# Altium PCB Template2.PcbDoc (part 2 of 2)
Units mm, origin at the board's own origin, x right, y up, seen from the top; angles counter-clockwise.
Board outline 69.9 x 99.85 mm, 4 copper layers (Top Layer, InternalGND, Internal3V3, Bottom Layer), stack 1.563 mm thick; 143 components, 104 nets, 478 pads, 688 vias.
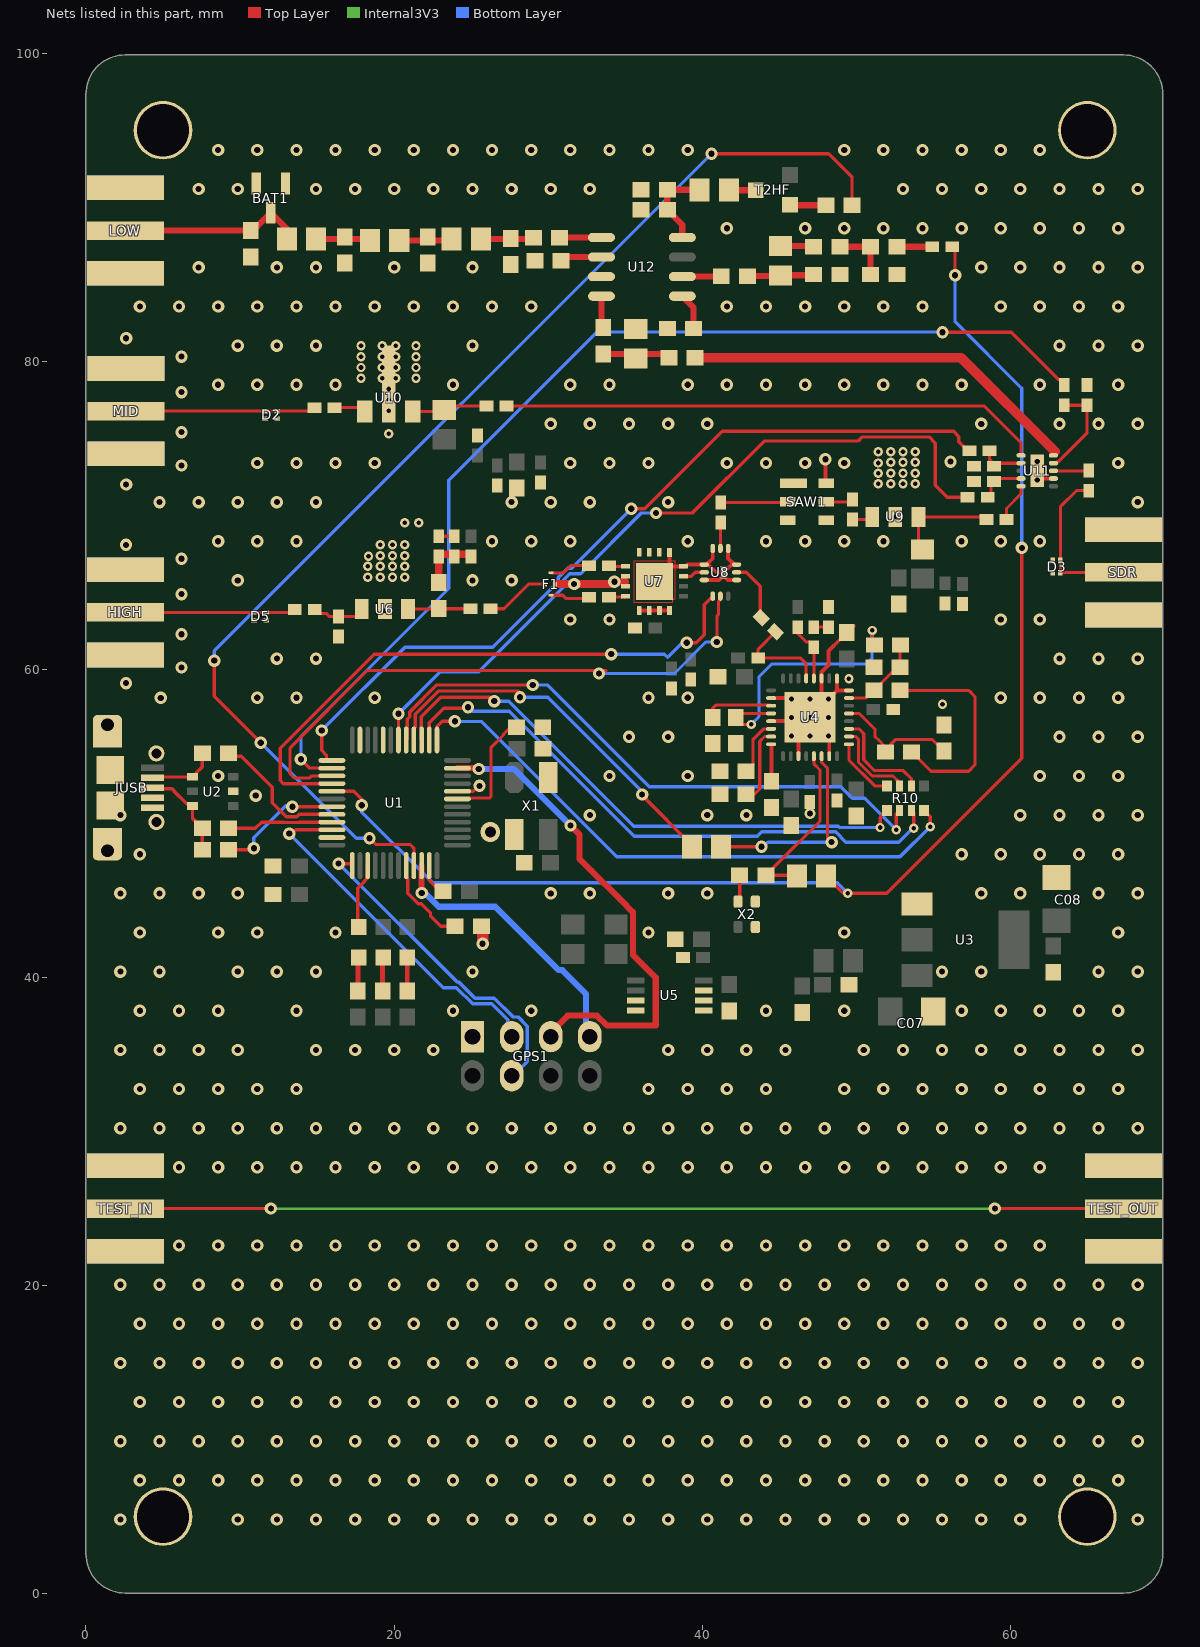
[diagram p4: the nets of this part, all layers, seen from the top]

## Via types
v1: diameter 0.8, hole 0.4, Top Layer to Bottom Layer, 595 vias
v2: diameter 0.61, hole 0.3, Top Layer to Bottom Layer, 55 vias
v3: diameter 0.6, hole 0.3, Top Layer to Bottom Layer, 16 vias
v4: diameter 0.66, hole 0.33, Top Layer to Bottom Layer, tented top, 11 vias
v5: diameter 1.27, hole 0.711, Top Layer to Bottom Layer, 10 vias
v6: diameter 0.7, hole 0.4, Top Layer to Bottom Layer, 1 vias

## Nets (pads, with @x,y where several pads share a name; then routed paths per layer and width w, separated by ;. In a path a pad name is that pad's centre, name@x,y a point inside that pad or via, vN(x,y) a via of type N, cw(c..) or ccw(c..) an arc to the next point about the centre after c; other vN are vias at no path point) (continued)
CPU_USB_LED: U1.39 USB.2 | length 3.9
  Top Layer w0.22: USB.2@17.654,43.576 17.654,45.804 18.066,46.216 18.066,46.237 18.271,46.442 18.271,47.249 U1.39@18.286,47.264
CS_PLL: R10.5 U1.14 | length 38.5
  Top Layer w0.22: U1.14@22.286,55.414 22.286,56.539 23.236,57.489 24.65,57.489 v1@24.8,57.639 ; R10.5@53.6,50.839 53.736,50.703 v3(53.736,49.689)
  Bottom Layer w0.22: v1(24.8,57.539) 25.06,57.279 27.48,57.279 35.6,49.159 43.587,49.159 43.877,49.449 48.673,49.449 49.333,48.789 52.764,48.789 53.664,49.689 v3(53.736,49.689)
CS_U1: R10.6 U4.3 | length 6.9
  Top Layer w0.2: U4.3@49.525,56.139 50.178,56.139 50.486,55.831 50.486,54.136 51.191,53.431 53.058,53.431 53.6,52.889 R10.6@53.6,52.439
DOWNCONV_IN: C44.2 U11.5 | length 2.5
  Top Layer w0.2: C44.2@59.75,69.739 59.75,70.45 60.7,71.4 U11.5@60.7,71.889
GND: BAT1.1 BAT1.2 C01.1 C02.1 C03.1 C04.1 C05.1 C06.1 C07.2 C08.2 C09.1 C10.1 C11.1 C12.1 C13.1 C14.1 C15.1 C16.1 C17.1 C18.1 C19.1 C20.1 C21.1 C22.1 C23.1 C25.1 C28.1 C29.1 C32.1 C33.2 C34.1 C38.1 C39.1 C40.1 C41.1 C45.2 C46.2 C47.1 C48.2 C49.2 C50.1 C54.1 C55.1 C56.1 C57.1 C58.1 C59.1 C60.1 C62.2 C64.1 D2.1 D2.2 D3.1 D3.2 D5.1 D5.2 F1.4 GPS1.1 H1.0 H2.0 H3.0 H4.0 HIGH.2 HIGH.3 HIGH.4 HIGH.5 JUSB.4 JUSB.5 JUSB.6 L9.1 LOW.2 LOW.3 LOW.4 LOW.5 MID.2 MID.3 MID.4 MID.5 R01.1 R08.1 R14.1 R17.1 R24.1 R26.1 R27.2 R28.2 SAW1.1 SAW1.3 SAW1.4 SAW1.6 SDR.2 SDR.3 SDR.4 SDR.5 TEST_IN.2 TEST_IN.3 TEST_IN.4 TEST_IN.5 TEST_OUT.2 TEST_OUT.3 TEST_OUT.4 TEST_OUT.5 U1.8 U1.20 U1.23 U1.35 U1.47 U2.2 U3.1 U4.8 U4.9 U4.11 U4.18 U4.21 U4.27 U4.31 U4.33 U5.3 U5.4 U5.5 U5.6 U5.7 U6.2 U7.4 U7.5 U7.6 U7.7 U7.8 U7.10 U7.11 U7.13 U7.14 U7.15 U7.16 U7.17 U8.1 U8.3 U8.4 U8.6 U8.10 U8.12 U8.13 U9.2 U10.2 U11.7 U11.11 U12.3 X1.2 X1.4 X2.1 X2.2 | length 55.1
  Top Layer w0.22: U1.35@15.946,49.074 U1.35@15.961,49.089 ; U1.47@22.286,47.264 22.286,46.298 22.975,45.609 C02.1@23.183,45.609 ; U1.8@24.111,52.089 25.15,52.092 v1(25.55,52.439) ; C05.1@29.65,55.279 30.04,54.889 30.08,54.889 C05.1@29.861,55.108 ; C06.1@29.861,56.028 C06.1@29.65,56.239 29.69,56.239 C06.1@30.08,55.849 ; C19.1@46.986,51.381 46.986,50.673 ccw(c47.034,50.673) v6(47,50.639)
  Top Layer w0.25: C33.2@22.9,68.639 C34.1@23.909,68.639 ; v1@34.001,65.539 34.151,65.689 v1(34.3,65.689) ; U7.11@35.013,65.387 35.013,65.689 U7.10@35.013,66.039 ; U7.17@35.925,64.739 U7.17@36.9,65.714 ; U7.13@35.925,63.825 U7.13@35.925,63.825 U7.14@36.575,63.825 ; U7.14@36.575,63.825 U7.14@36.575,63.825 ; U7.16@37.875,63.826 37.227,63.827 37.225,63.826 U7.14@36.575,63.825 U7.14@36.575,63.825 ; U7.17@37.875,64.739 U7.17@36.9,65.714 ; U7.5@37.875,67.599 37.875,67.064 U7.17@37.875,66.689 ; U8.6@40.136,65.804 41.086,65.804 U8.13@41.386,66.104 ; U8.3@40.686,67.854 40.686,67.204 40.286,66.804 U8.4@40.136,66.804 ; U8.1@41.686,67.854 41.686,67.204 42.086,66.804 U8.12@42.236,66.804 42.226,66.794 41.901,66.794 41.686,66.579 41.461,66.579 41.386,66.504 U8.13@41.386,66.304 ; U8.10@42.236,65.804 41.686,65.804 U8.13@41.386,66.104 ; U4.21@44.475,56.639 U4.33@46.75,56.639 ; U4.18@44.475,58.139 45.75,58.139 v4(45.8,58.089) v4(47,56.889) ; U4.27@46.25,54.364 46.25,56.139 U4.33@46.75,56.639 ; v1(47.996,73.639) 47.996,72.128 SAW1.6@48.047,72.076 ; U4.31@48.25,54.364 48.25,55.639 v4(48.2,55.689) v4(47,56.889) ; U4.9@48.75,59.414 48.75,58.639 ; U4.8@49.525,58.639 48.75,58.639 ; C15.1@49.811,62.806 49.761,62.806 49.386,62.431 C15.1@49.386,62.381 49.386,62.331 49.011,61.956 48.961,61.956 48.2,61.195 48.2,60.289 47.75,59.839 U4.11@47.75,59.414 U4.33@47.75,57.639 ; U11.11@61.75,72.889 61.75,72.714 62.075,72.389 U11.7@62.8,72.389 ; U7.17@36.9,65.714 U7.17@37.875,66.689 ; U7.17@37.876,66.689 38.25,66.689 U7.4@38.787,66.689 38.925,66.689 39.039,66.804 U8.4@40.136,66.804 ; U8.4@40.136,66.804 40.146,66.794 40.421,66.794 40.911,66.304 U8.13@41.386,66.304 ; U8.13@41.386,66.104 U8.13@41.386,66.304 ; U4.33@46.75,56.639 v4(47,56.889) ; v4(47,56.889) U4.33@47.75,57.639 ; U4.33@47.75,57.639 48.75,58.639
  Top Layer w0.5: F1.4@30.511,65.539 v1@34.001,65.539 ; v1(34.3,65.689) 35.013,65.689
  Top Layer w0.75: v1(25.75,42.189) R01.1@25.75,43.289
  other v1: 2.23,4.819 9.85,4.819 12.39,4.819 14.93,4.819 17.47,4.819 20.01,4.819 22.55,4.819 25.09,4.819 27.63,4.819 30.17,4.819 32.71,4.819 35.25,4.819 37.79,4.819 40.33,4.819 42.87,4.819 45.41,4.819 47.95,4.819 50.49,4.819 53.03,4.819 55.57,4.819 58.11,4.819 60.65,4.819 68.27,4.819 3.5,7.359 6.04,7.359 8.58,7.359 11.12,7.359 13.66,7.359 16.2,7.359 18.74,7.359 21.28,7.359 23.82,7.359 26.36,7.359 28.9,7.359 31.44,7.359 33.98,7.359 36.52,7.359 39.06,7.359 41.6,7.359 44.14,7.359 46.68,7.359 49.22,7.359 51.76,7.359 54.3,7.359 56.84,7.359 59.38,7.359 61.92,7.359 64.46,7.359 67,7.359 2.23,9.899 4.77,9.899 7.31,9.899 9.85,9.899 12.39,9.899 14.93,9.899 17.47,9.899 20.01,9.899 22.55,9.899 25.09,9.899 27.63,9.899 30.17,9.899 32.71,9.899 35.25,9.899 37.79,9.899 40.33,9.899 42.87,9.899 45.41,9.899 47.95,9.899 50.49,9.899 53.03,9.899 55.57,9.899 58.11,9.899 60.65,9.899 63.19,9.899 65.73,9.899 68.27,9.899 3.5,12.439 6.04,12.439 8.58,12.439 11.12,12.439 13.66,12.439 16.2,12.439 18.74,12.439 21.28,12.439 23.82,12.439 26.36,12.439 28.9,12.439 31.44,12.439 33.98,12.439 36.52,12.439 39.06,12.439 41.6,12.439 44.14,12.439 46.68,12.439 49.22,12.439 51.76,12.439 54.3,12.439 56.84,12.439 59.38,12.439 61.92,12.439 64.46,12.439 67,12.439 2.23,14.979 4.77,14.979 7.31,14.979 9.85,14.979 12.39,14.979 14.93,14.979 17.47,14.979 20.01,14.979 22.55,14.979 25.09,14.979 27.63,14.979 30.17,14.979 32.71,14.979 35.25,14.979 37.79,14.979 40.33,14.979 42.87,14.979 45.41,14.979 47.95,14.979 50.49,14.979 53.03,14.979 55.57,14.979 58.11,14.979 60.65,14.979 63.19,14.979 65.73,14.979 68.27,14.979 3.5,17.519 6.04,17.519 8.58,17.519 11.12,17.519 13.66,17.519 16.2,17.519 18.74,17.519 21.28,17.519 23.82,17.519 26.36,17.519 28.9,17.519 31.44,17.519 33.98,17.519 36.52,17.519 39.06,17.519 41.6,17.519 44.14,17.519 46.68,17.519 49.22,17.519 51.76,17.519 54.3,17.519 56.84,17.519 59.38,17.519 61.92,17.519 64.46,17.519 67,17.519 2.23,20.059 4.77,20.059 7.31,20.059 9.85,20.059 12.39,20.059 14.93,20.059 17.47,20.059 20.01,20.059 22.55,20.059 25.09,20.059 27.63,20.059 30.17,20.059 32.71,20.059 35.25,20.059 37.79,20.059 40.33,20.059 42.87,20.059 45.41,20.059 47.95,20.059 50.49,20.059 53.03,20.059 55.57,20.059 58.11,20.059 60.65,20.059 63.19,20.059 65.73,20.059 68.27,20.059 6.04,22.599 8.58,22.599 11.12,22.599 13.66,22.599 16.2,22.599 18.74,22.599 21.28,22.599 23.82,22.599 26.36,22.599 28.9,22.599 31.44,22.599 33.98,22.599 36.52,22.599 39.06,22.599 41.6,22.599 44.14,22.599 46.68,22.599 49.22,22.599 51.76,22.599 54.3,22.599 56.84,22.599 59.38,22.599 61.92,22.599 6.04,27.679 8.58,27.679 11.12,27.679 13.66,27.679 16.2,27.679 18.74,27.679 21.28,27.679 23.82,27.679 26.36,27.679 28.9,27.679 31.44,27.679 33.98,27.679 36.52,27.679 39.06,27.679 41.6,27.679 44.14,27.679 46.68,27.679 49.22,27.679 51.76,27.679 54.3,27.679 56.84,27.679 59.38,27.679 61.92,27.679 2.23,30.219 4.77,30.219 7.31,30.219 9.85,30.219 12.39,30.219 14.93,30.219 17.47,30.219 20.01,30.219 22.55,30.219 25.09,30.219 27.63,30.219 30.17,30.219 32.71,30.219 35.25,30.219 37.79,30.219 40.33,30.219 42.87,30.219 45.41,30.219 47.95,30.219 50.49,30.219 53.03,30.219 55.57,30.219 58.11,30.219 60.65,30.219 63.19,30.219 65.73,30.219 68.27,30.219 3.5,32.759 6.04,32.759 8.58,32.759 11.12,32.759 13.66,32.759 36.52,32.759 39.06,32.759 41.6,32.759 44.14,32.759 49.22,32.759 51.76,32.759 54.3,32.759 56.84,32.759 59.38,32.759 61.92,32.759 64.46,32.759 67,32.759 2.23,35.299 4.77,35.299 7.31,35.299 9.85,35.299 14.93,35.299 17.47,35.299 20.01,35.299 22.55,35.299 37.79,35.299 40.33,35.299 42.87,35.299 45.41,35.299 50.49,35.299 53.03,35.299 55.57,35.299 58.11,35.299 60.65,35.299 63.19,35.299 65.73,35.299 68.27,35.299 3.5,37.839 6.04,37.839 8.58,37.839 13.66,37.839 23.82,37.839 28.9,37.839 44.14,37.839 49.22,37.839 56.84,37.839 59.38,37.839 61.92,37.839 64.46,37.839 67,37.839 2.23,40.379 4.77,40.379 9.85,40.379 12.39,40.379 14.93,40.379 25.09,40.379 55.57,40.379 58.11,40.379 65.73,40.379 68.27,40.379 3.5,42.919 8.58,42.919 11.12,42.919 16.2,42.919 36.52,42.919 49.22,42.919 67,42.919 2.23,45.459 4.77,45.459 7.31,45.459 9.85,45.459 30.17,45.459 32.71,45.459 37.79,45.459 40.33,45.459 58.11,45.459 60.65,45.459 65.73,45.459 68.27,45.459 3.5,47.999 56.84,47.999 59.38,47.999 61.92,47.999 64.46,47.999 67,47.999 2.23,50.539 32.71,50.539 40.33,50.539 42.87,50.539 60.65,50.539 63.19,50.539 65.73,50.539 68.27,50.539 11.02,51.805 8.58,53.079 33.98,53.079 39.06,53.079 61.92,53.079 64.46,53.079 67,53.079 35.25,55.619 37.79,55.619 63.19,55.619 65.73,55.619 68.27,55.619 4.849,58.153 11.12,58.159 13.66,58.159 18.74,58.159 36.52,58.159 39.06,58.159 59.38,58.159 61.92,58.159 64.46,58.159 67,58.159 2.594,59.108 6.2,60.123 12.39,60.699 14.93,60.699 63.19,60.699 65.73,60.699 68.27,60.699 6.2,62.285 31.44,63.239 33.98,63.239 59.38,63.239 61.92,63.239 6.2,64.885 31.686,65.539 9.85,65.779 25.09,65.779 27.63,65.779 6.2,67.185 2.594,68.084 8.58,68.319 11.12,68.319 13.66,68.319 26.36,68.319 28.9,68.319 31.44,68.319 39.06,68.319 44.14,68.319 46.68,68.319 49.22,68.319 51.76,68.319 56.84,68.319 59.38,68.319 61.92,68.319 4.77,70.859 7.31,70.859 9.85,70.859 12.39,70.859 14.93,70.859 27.63,70.859 30.17,70.859 32.71,70.859 37.79,70.859 68.27,70.859 2.606,72 6.2,73.239 11.12,73.399 13.66,73.399 16.2,73.399 18.74,73.399 31.44,73.399 33.98,73.399 36.52,73.399 41.6,73.399 44.14,73.399 46.68,73.399 49.22,73.399 67,73.399 56.115,73.489 6.2,75.4 30.17,75.939 32.71,75.939 35.25,75.939 37.79,75.939 40.33,75.939 58.11,75.939 63.19,75.939 65.73,75.939 68.27,75.939 6.2,78 8.58,78.479 11.12,78.479 13.66,78.479 16.2,78.479 23.82,78.479 31.44,78.479 33.98,78.479 39.06,78.479 41.6,78.479 44.14,78.479 46.68,78.479 49.22,78.479 51.76,78.479 54.3,78.479 56.84,78.479 61.92,78.479 67,78.479 6.2,80.3 9.85,81.019 12.39,81.019 14.93,81.019 25.09,81.019 63.19,81.019 65.73,81.019 68.27,81.019 2.606,81.5 3.5,83.559 6.04,83.559 8.58,83.559 11.12,83.559 13.66,83.559 16.2,83.559 18.74,83.559 21.28,83.559 23.82,83.559 26.36,83.559 28.9,83.559 41.6,83.559 44.14,83.559 46.68,83.559 49.22,83.559 51.76,83.559 54.3,83.559 59.38,83.559 61.92,83.559 64.46,83.559 67,83.559 7.31,86.099 12.39,86.099 14.93,86.099 20.01,86.099 25.09,86.099 58.11,86.099 60.65,86.099 63.19,86.099 65.73,86.099 68.27,86.099 41.6,88.639 46.68,88.639 49.22,88.639 51.76,88.639 54.3,88.639 56.84,88.639 59.38,88.639 61.92,88.639 64.46,88.639 67,88.639 7.31,91.179 9.85,91.179 14.93,91.179 17.47,91.179 20.01,91.179 22.55,91.179 25.09,91.179 27.63,91.179 30.17,91.179 32.71,91.179 53.03,91.179 55.57,91.179 58.11,91.179 60.65,91.179 63.19,91.179 65.73,91.179 68.27,91.179 8.58,93.719 11.12,93.719 13.66,93.719 16.2,93.719 18.74,93.719 21.28,93.719 23.82,93.719 26.36,93.719 28.9,93.719 31.44,93.719 33.98,93.719 36.52,93.719 39.06,93.719 49.22,93.719 51.76,93.719 54.3,93.719 56.84,93.719 59.38,93.719 61.92,93.719
  other v2: 19.4,63.809 18.3,65.985 19.1,65.985 19.9,65.985 20.7,65.985 18.3,66.685 19.1,66.685 19.9,66.685 20.7,66.685 18.343,67.342 19.1,67.385 19.9,67.385 20.7,67.385 19.1,68.084 19.9,68.084 20.7,68.084 20.7,69.525 21.6,69.525 52.536,69.903 51.438,72.039 52.238,72.039 53.038,72.039 53.838,72.039 51.438,72.739 52.238,72.739 53.038,72.739 53.838,72.739 51.438,73.397 52.238,73.439 53.038,73.439 53.838,73.439 51.438,74.139 52.238,74.139 53.038,74.139 53.838,74.139 19.65,75.3 19.65,76.8 19.65,77.5 19.65,78.2 17.85,78.9 19.236,78.9 20.104,78.9 21.425,78.9 17.85,79.6 19.236,79.6 20.104,79.6 21.425,79.6 17.85,80.3 19.236,80.3 20.104,80.3 21.425,80.3 17.85,81 19.236,81 20.104,81 21.425,81
  other v3: 55.6,57.739 49.525,59.389
  other v4: 45.8,55.689 47,55.689 45.8,56.889 48.2,56.889 47,58.089 48.2,58.089 61.75,72.289 61.75,73.489
  other v5: 26.254,49.443
GPS_RST: GPS1.7 U1.46 | length 18.3
  Top Layer w0.4: U1.46@21.786,47.264 21.786,45.789 22,45.575 21.914,45.489 v1(21.8,45.489)
  Bottom Layer w0.4: v1(21.8,45.489) 22,45.489 22.9,44.589 26.569,44.589 30.678,40.48 30.916,40.48 32.458,38.939 32.458,36.665 32.71,36.413 GPS1.7@32.71,36.159
HIGH1: C31.2 D5.3 D5.4 HIGH.1 | length 11.1
  Top Layer w0.2: HIGH.1@2.56,63.7 2.563,63.697 D5.4@10.9,63.697 D5.3@11.7,63.697 13.358,63.697 C31.2@13.55,63.889
HIGH2: C31.1 C32.2 U6.1 | length 3.5
  Top Layer w0.2: C31.1@14.85,63.889 15.1,63.639 15.589,63.639 15.789,63.439 C32.2@16.4,63.439 17.55,63.439 17.9,63.789 U6.1@17.9,63.914
HIGH3: C35.1 L2.1 U6.3 | length 4.1
  Top Layer w0.2: U6.3@20.9,63.914 22.875,63.914 L2.1@22.9,63.939 C35.1@24.95,63.939
HIGH4: C35.2 F1.2 | length 4.3
  Top Layer w0.2: C35.2@26.25,63.939 27.133,63.939 28.733,65.539 F1.2@29.861,65.539
HIGH5: U7.3 U8.5 | length 1.5
  Top Layer w0.2: U7.3@38.787,66.039 39.295,66.039 39.56,66.304 U8.5@40.136,66.304
HIGH6: C42.1 U8.2 | length 1.7
  Top Layer w0.2: U8.2@41.186,67.854 41.186,69.525 C42.1@41.2,69.539
HIGH7: C42.2 SAW1.2 | length 4.4
  Top Layer w0.2: C42.2@41.2,70.839 45.51,70.839 SAW1.2@45.547,70.876
HIGH8: C43.1 SAW1.5 | length 1.8
  Top Layer w0.2: SAW1.5@48.047,70.876 49.599,70.876 C43.1@49.761,71.039
HIGH9: C43.2 U9.1 | length 1.3
  Top Layer w0.2: C43.2@49.761,69.739 50.872,69.739 U9.1@51.036,69.903
HIGH10: C44.1 L3.1 U9.3 | length 6.7
  Top Layer w0.2: L3.1@54.3,67.789 54.036,68.053 U9.3@54.036,69.903 58.286,69.903 C44.1@58.45,69.739
IMG_F_HIGH: C36.1 F1.3 | length 2.6
  Top Layer w0.2: F1.3@30.186,64.814 30.948,64.814 31.15,64.612 32.573,64.612 C36.1@32.65,64.689
IMG_F_LOW: C37.1 F1.1 | length 2.7
  Top Layer w0.2: F1.1@30.186,66.264 30.978,66.264 31.448,66.734 C37.1@32.65,66.734
LO+: C26.2 U8.11 | length 4
  Top Layer w0.2: U8.11@42.236,66.304 42.86,66.304 43.77,65.394 43.77,63.426 C26.2@43.84,63.356
LO-: C27.2 R14.2 | length 1
  Top Layer w0.2: C27.2@47.236,62.739 R14.2@48.2,62.739
MCO: C67.2 R11.2 U1.29 | length 88.9
  Top Layer w0.2: C67.2@56.236,87.431 56.422,87.245 v1(56.422,85.581)
  Top Layer w0.22: U1.29@15.961,52.089 17.379,52.089 17.9,51.568 v1(17.9,51.179) ; R11.2@48.05,46.589 49.171,45.468 v3(49.45,45.468) 51.979,45.468 60.75,54.239 v1(60.75,67.889)
  Bottom Layer w0.2: v1(56.422,85.581) 56.422,82.567 60.75,78.239
  Bottom Layer w0.22: v1@17.68,51.399 v1(17.9,51.179) 17.9,50.739 22.5,46.139 48.779,46.139 v3(49.45,45.468) ; v1(60.75,67.889) 60.75,78.239
MID1: C51.1 D2.3 D2.4 MID.1 | length 12.3
  Top Layer w0.2: MID.1@2.606,76.764 D2.4@11.613,76.764 D2.3@12.413,76.764 14.615,76.764 C51.1@14.84,76.989
MID2: C51.2 U10.1 | length 1.9
  Top Layer w0.2: C51.2@16.14,76.989 17.85,76.989 U10.1@17.975,76.864
MID3: C52.1 L4.1 U10.3 | length 4.9
  Top Layer w0.2: U10.3@21.2,76.739 23.059,76.739 L4.1@23.209,76.889 ; L4.1@23.259,76.839 23.509,77.089 C52.1@25.989,77.089
MID_IN: C52.2 U11.1 | length 35.2
  Top Layer w0.2: C52.2@27.289,77.089 58.329,77.089 60.7,74.718 U11.1@60.7,73.889
MIX_EN: U1.28 U8.7 | length 38.7
  Top Layer w0.22: U1.28@15.961,52.589 12.819,52.589 12.6,52.808 12.6,54.889 18.7,60.989 v1(34.1,60.989) ; v1(39,61.731) 39.601,61.731 40.126,62.256 40.126,64.194 U8.7@40.686,64.754
  Bottom Layer w0.22: v1(34.1,60.989) 37.55,60.989 37.75,60.789 v1@38.7,61.739
MIX_X2: U1.27 U8.8 | length 39.3
  Top Layer w0.2: U1.27@15.961,53.089 14.659,53.089 14.519,52.949 13.507,52.949 13.25,53.206 13.25,54.908 18.268,59.927 33.762,59.927 33.575,59.739 v1(33.3,59.739) ; v1(40.95,61.779) 40.95,63.458 41.046,63.554 41.046,64.398 41.136,64.488 41.136,64.527 41.186,64.577 U8.8@41.186,64.754
  Bottom Layer w0.2: v1(33.3,59.739) 38.2,59.739 40.24,61.779 v1(40.95,61.779)
MOSI: R10.3 U1.17 | length 39.4
  Top Layer w0.22: U1.17@20.786,55.414 20.86,55.488 20.86,56.759 21.016,56.916 21.016,57.233 22.772,58.989 v1@28.986,58.989 ; v3(52.6,49.589) 52.6,50.639 R10.3@52.8,50.839
  Bottom Layer w0.22: v1(29,58.989) 29.95,58.989 36.55,52.389 49.008,52.389 49.754,51.643 50.546,51.643 v3(52.6,49.589)
MOSI_U1: R10.4 U4.2 | length 5.6
  Top Layer w0.2: U4.2@49.525,55.639 49.978,55.639 50.136,55.481 50.136,53.991 51.046,53.081 52.386,53.081 52.8,52.667 R10.4@52.8,52.439
MUXOUT_U1: R09.2 U4.30 | length 13.3
  Top Layer w0.2: U4.30@47.75,54.364 47.75,53.967 48.136,53.581 48.136,49.053 v1(48.4,48.789) v1@48.5,48.689
  Top Layer w0.22: R09.2@41.236,48.489 43.394,48.489 v1(43.85,48.489)
  Bottom Layer w0.22: v1(43.85,48.489) 43.969,48.489 44.269,48.789 v1(48.4,48.789)
NetC06_2: C06.2 U1.7 | length 7.2
  Top Layer w0.2: U1.7@24.111,51.589 24.863,51.589 24.913,51.639 26.183,51.639 26.3,51.756 26.3,54.939 27.1,55.739 27.1,55.789 27.5,56.189 C06.2@27.55,56.189
NetC20_2: C20.2 U4.23 | length 5
  Top Layer w0.2: C20.2@42.85,51.889 43.394,51.889 43.736,52.231 43.736,55.331 44.044,55.639 U4.23@44.475,55.639
NetC21_2: C21.2 U4.19 | length 4.5
  Top Layer w0.2: C21.2@40.686,56.881 40.686,57.481 40.886,57.681 44.433,57.681 U4.19@44.475,57.639
NetC22_2: C22.2 U4.24 | length 2.4
  Top Layer w0.25: U4.24@44.475,55.139 44.5,55.114 C22.2@44.5,52.739
NetC23_2: C23.2 C24.2 R15.1 U4.7 | length 5.7
  Top Layer w0.2: U4.7@49.525,58.139 50.65,58.139 C24.2@51.15,58.639 52.65,60.139 C23.2@52.85,60.139 52.836,60.153 R15.1@52.836,61.631
NetC24_1: C24.1 R16.2 | length 14.2
  Top Layer w0.2: C24.1@52.85,58.639 57.3,58.639 57.7,58.239 57.7,53.789 57.3,53.389 54.85,53.389 R16.2@53.6,54.639
NetC33_1: C33.1 C34.2 L2.2 R20.2 | length 4
  Top Layer w0.22: C33.1@22.9,67.479 C33.1@22.9,67.539
  Top Layer w0.5: L2.2@22.9,65.639 C33.1@22.9,67.339 22.9,67.479 R20.2@25,67.479
NetC54_2: C54.2 R21.2 U11.4 | length 2.9
  Top Layer w0.22: R21.2@58.4,70.945 58.75,71.295 C54.2@58.75,72.097 ; C54.2@59.05,72.389 U11.4@60.7,72.389
NetC55_2: C55.2 R22.2 U11.2 | length 2.7
  Top Layer w0.22: R22.2@58.65,74.189 58.65,73.614 58.875,73.389 U11.2@60.7,73.389
NetC56_2: C56.2 R23.2 U11.9 | length 6.3
  Top Layer w0.22: U11.9@62.815,73.404 U11.9@62.8,73.389 62.972,73.389 63.062,73.479 63.12,73.479 64.978,75.337 C56.2@64.978,77.15 R23.2@63.5,77.15
NetC57_2: C57.2 C58.2 L5.1 U12.8 | length 5.6
  Top Layer w0.4: U12.8@38.711,88.036 38.711,88.856 C57.2@37.736,89.831 C58.2@37.736,91.131 L5.1@39.836,91.131
NetC59_2: C59.2 L6.1 L7.2 | length 3.5
  Top Layer w0.4: L6.1@14.936,87.931 18.336,87.931 L7.2@18.436,87.831
NetC60_2: C60.2 L7.1 L8.2 | length 3.4
  Top Layer w0.4: L7.1@20.336,87.831 23.636,87.831 L8.2@23.736,87.931
NetC61_2: C61.2 L8.1 R26.2 | length 3.4
  Top Layer w0.4: L8.1@25.636,87.931 28.936,87.931 C61.2@29.036,88.031
NetC65_2: C65.2 C66.1 L9.2 | length 4.4
  Top Layer w0.4: C65.2@33.586,80.481 37.586,80.481 C66.1@37.836,80.231
NetC67_1: C67.1 R36HF.2 | length 2.1
  Top Layer w0.4: R36HF.2@52.636,87.431 C67.1@54.736,87.431
NetC68_1: C68.1 L10.2 | length 2.2
  Top Layer w0.4: L10.2@45.086,87.481 47.186,87.481 C68.1@47.236,87.431
NetC68_2: C68.2 R27.1 R36HF.1 | length 3.8
  Top Layer w0.4: C68.2@48.936,87.431 R36HF.1@50.936,87.431 R27.1@50.936,85.631
NetL5_2: L5.2 T2HF.3 | length 1.7
  Top Layer w0.4: L5.2@41.736,91.131 41.761,91.106 T2HF.3@43.468,91.106
NetLOCK_1: LOCK.1 R03.1 | length 1.9
  Top Layer w0.32: R03.1@19.254,39.135 LOCK.1@19.254,40.994
NetMIX_1: MIX.1 R04.1 | length 1.9
  Top Layer w0.32: R04.1@20.854,39.135 MIX.1@20.854,40.994
NetR01_2: R01.2 U1.44 | length 6
  Top Layer w0.22: U1.44@20.786,47.264 20.786,46.517 20.876,46.427 20.876,45.479 21.568,44.788 21.776,44.788 22.362,44.202 22.362,43.993 23.017,43.339 23.55,43.339 23.9,43.689 R01.2@23.95,43.689
NetR02_1: R02.1 USB.1 | length 1.9
  Top Layer w0.32: R02.1@17.654,39.135 USB.1@17.654,40.994
NetR08_2: R08.2 U4.22 | length 3.7
  Top Layer w0.2: R08.2@42.85,53.389 43.286,53.825 43.286,55.431 43.994,56.139 U4.22@44.475,56.139
NetR10_2: R10.2 U4.1 | length 4.2
  Top Layer w0.2: U4.1@49.525,55.139 49.525,54.107 51.193,52.439 R10.2@52,52.439
OUT1: C53.1 U11.8 | length 2.3
  Top Layer w0.2: U11.8@62.819,72.908 U11.8@62.8,72.889 65.089,72.889 C53.1@65.1,72.9
OUT2: C53.2 D3.3 D3.4 SDR.1 | length 11.2
  Top Layer w0.2: C53.2@64.85,71.25 65.1,71.5 C53.2@65.1,71.6 64.295,71.6 63.25,70.555 D3.4@63.25,67.077 D3.3@63.25,66.277 67.417,66.277 SDR.1@67.44,66.3
PLL_EN: R10.7 U1.13 | length 38.8
  Top Layer w0.22: U1.13@22.786,55.414 22.801,55.429 22.801,56.304 23.132,56.635 v1(23.946,56.635) ; R10.7@54.4,50.839 54.8,50.439 v3(54.8,49.789)
  Bottom Layer w0.22: v1(23.946,56.635) 23.879,56.639 23.946,56.637 25.7,56.589 34.46,47.829 52.84,47.829 v3(54.8,49.789)
PLL_MISO: R09.1 U1.16 | length 24.9
  Top Layer w0.22: U1.16@21.286,55.414 21.286,56.161 21.376,56.251 21.376,56.752 21.386,56.762 21.386,57.08 22.905,58.599 28.04,58.599 v1@28.4,58.239 ; v1@36.175,52.014 36.175,51.75 39.336,48.589 R09.1@39.336,48.489
  Bottom Layer w0.22: v1(28.175,58.189) 29.979,58.189 36.154,52.014 v1@36.175,52.014
  other v1: 36.1,51.876
PPS_IN: GPS1.5 U1.11 | length 32
  Top Layer w0.4: U1.11@24.111,53.589 25.442,53.589 v1(25.5,53.531) ; GPS1.5@30.17,36.159 30.17,36.429 31.266,37.525 33.171,37.525 33.822,36.874 36.984,36.873 36.984,39.992 35.5,41.476 35.5,44.234 34.7,45.034 32.8,46.939 32.029,47.71 32.029,49.289 v1(31.45,49.868)
  Bottom Layer w0.4: v1(25.5,53.531) 27.787,53.531 v1(31.45,49.868)
REF_PLL: C30.2 R11.1 U4.29 | length 11.4
  Top Layer w0.2: C30.2@44.136,46.639 C30.2@44.186,46.639 ; R11.1@46.15,46.589 46.1,46.639 C30.2@44.186,46.639 ; U4.29@47.25,54.364 47.25,53.867 47.65,53.467 47.65,50.153 44.586,47.089 44.586,47.039 C30.2@44.186,46.639
RFOUTA+: C26.1 R12.1 U4.13 | length 6.4
  Top Layer w0.2: C26.1@44.76,62.436 43.636,61.313 R12.1@43.636,60.731 46.394,60.731 46.75,60.375 U4.13@46.75,59.414
RFOUTA-: C27.1 R13.1 U4.12 | length 3.9
  Top Layer w0.2: R13.1@46.2,62.739 46.2,62.331 46.752,61.779 46.986,61.779 47.25,61.515 C27.1@47.25,61.425 ; C27.1@47.236,61.439 C27.1@47.25,61.425 ; U4.12@47.25,59.414 C27.1@47.25,61.425
SCK: R10.1 U1.15 | length 36.6
  Top Layer w0.22: 21.756,56.609 21.756,56.225 21.771,56.211 21.771,55.429 U1.15@21.786,55.414 ; 21.756,56.609 21.756,56.927 23.028,58.199 26.24,58.199 v1(26.5,57.939) ; v3(51.55,49.739) 51.55,50.389 R10.1@52,50.839
  Bottom Layer w0.22: v1(26.5,57.939) 27.45,57.939 35.57,49.819 48.827,49.819 48.907,49.739 v3(51.55,49.739)
SMA_SW: BAT1.3 L6.2 LOW.1 R24.2 | length 11.6
  Top Layer w0.4: LOW.1@2.56,88.484 2.563,88.481 R24.2@10.7,88.481 ; R24.2@11.086,88.725 BAT1.3@12,89.639 13.036,88.603 L6.2@13.036,87.931
Stripline: TEST_IN.1 TEST_OUT.1 | length 64.8
  Top Layer w0.2: TEST_IN.1@2.56,25 v1(12,25) ; v1(59,25) TEST_OUT.1@67.34,25
  Internal3V3 w0.16: v1(12,25) v1(59,25)
SW_BYPASS: R22.1 U1.25 | length 53.4
  Top Layer w0.22: v1(15.3,56.039) 15.3,54.75 15.61,54.44 15.61,54.126 15.647,54.089 U1.25@15.961,54.089 ; v1(35.397,70.426) 36.275,70.426 41.306,75.458 56.32,75.458 56.666,75.112 56.666,74.773 57.25,74.189 R22.1@57.35,74.189
  Bottom Layer w0.22: v1(15.3,56.039) 20.708,61.447 26.417,61.447 30.656,65.686 30.656,65.966 31.259,66.569 31.539,66.569 v1(35.397,70.426)
SW_MIX: R21.1 U1.18 | length 49.6
  Top Layer w0.22: U1.18@20.286,55.414 v1(20.286,57.119) ; v1(37,70.153) 39.346,70.153 44.016,74.823 50.113,74.823 50.378,75.088 54.729,75.088 55.124,74.692 55.124,71.956 55.902,71.178 R21.1@57.233,71.178
  Bottom Layer w0.22: v1(20.286,57.119) 23.006,59.839 25.493,59.839 31.026,65.372 31.026,65.812 31.413,66.199 32.102,66.199 36.057,70.153 v1(37,70.153)
SW_MIX_CPU: R23.1 U1.26 | length 69.8
  Top Layer w0.2: v1(13.95,54.164) 14.525,53.589 U1.26@15.961,53.589
  Top Layer w0.22: v1(55.6,81.889) 60.061,81.889 63.16,78.79 63.26,78.79 63.5,78.55 R23.1@63.5,78.45
  Bottom Layer w0.2: v1(13.95,54.164) 13.95,55.648 23.549,65.248 23.549,72.288 33.15,81.889 v1(55.6,81.889)
SW_U1: R16.1 R17.2 U4.5 | length 8.3
  Top Layer w0.2: U4.5@49.525,57.139 50.196,57.139 51.204,56.131 51.204,55.659 51.382,55.481 51.386,55.481 51.9,54.967 R16.1@51.9,54.803 ; R16.1@51.9,54.639 R16.1@51.9,54.803 ; R17.2@55.7,54.689 54.95,55.439 52.536,55.439 R16.1@51.9,54.803
SWCLK: GPS1.4 U1.37 | length 21.3
  Top Layer w0.22: v1(16.4,47.389) 17.249,47.389 17.286,47.352 U1.37@17.286,47.264
  Bottom Layer w0.22: v1(16.4,47.389) 16.419,47.389 24.099,39.709 24.203,39.709 25.253,38.659 26.503,38.659 27.727,37.435 28.053,37.435 28.652,36.836 28.652,35.156 28.659,35.149 28.659,34.548 28.359,34.248 ; GPS1.4@27.63,33.619 27.729,33.619 28.358,34.248
SWDIO: GPS1.3 U1.34 | length 23.3
  Top Layer w0.22: v1(13.2,49.339) 13.357,49.339 13.607,49.589 U1.34@15.961,49.589
  Bottom Layer w0.22: v1(13.2,49.339) 23.2,39.339 24.05,39.339 25.1,38.289 26.35,38.289 27.38,37.258 27.38,36.408 GPS1.3@27.63,36.159
T2_BASE: R25.2 T2HF.1 | length 2.3
  Top Layer w0.4: T2HF.1@45.704,90.166 45.738,90.131 R25.2@48.036,90.131
TUNE: C25.2 R15.2 U4.20 | length 17.4
  Top Layer w0.2: C25.2@42.186,56.881 42.636,56.431 v3(43.186,56.431) ; C25.2@42.25,56.989 42.4,57.139 U4.20@44.475,57.139 ; v3(51.036,62.531) 51.036,61.731 R15.2@51.186,61.581
  Bottom Layer w0.2: v3(43.186,56.431) 43.686,56.931 43.686,59.525 44.5,60.339 50.65,60.339 51.036,60.725 v3(51.036,62.531)
U15_INA: C61.1 U12.1 | length 2.7
  Top Layer w0.4: C61.1@30.736,88.031 33.456,88.031 U12.1@33.461,88.036
U15_INB: C62.1 U12.2 | length 2.7
  Top Layer w0.4: C62.1@30.836,86.531 31.071,86.766 U12.2@33.461,86.766
U15_OSCB: C63.1 U12.6 | length 2.5
  Top Layer w0.4: U12.6@38.711,85.496 41.201,85.496 C63.1@41.236,85.531
U15_OSCB_FILTERED: C63.2 L10.1 R28.1 | length 4.3
  Top Layer w0.4: C63.2@42.936,85.531 45.036,85.531 L10.1@45.086,85.581 47.186,85.581 R28.1@47.236,85.631
U15_OUTA: C65.1 U12.4 | length 2.1
  Top Layer w0.4: U12.4@33.461,84.226 33.461,82.306 C65.1@33.586,82.181
U15_OUTB: C64.2 U12.5 | length 2.4
  Top Layer w0.4: U12.5@38.711,84.226 39.436,83.501 C64.2@39.436,82.131
UPCONV_EN#: R25.1 U1.45 | length 78.3
  Top Layer w0.2: v1(8.328,60.567) 8.328,58.261 v1(11.35,55.239) ; v1(18.4,49.039) 18.8,48.639 21.035,48.639 21.286,48.388 U1.45@21.286,47.264 ; v1(40.6,93.474) 48.21,93.474 49.736,91.948 R25.1@49.736,90.131
  Bottom Layer w0.2: v1(8.328,60.567) 8.328,61.202 v1(40.6,93.474) ; v1(11.35,55.239) 17.55,49.039 v1(18.4,49.039)
UPCONV_IN: C66.2 U11.10 | length 25.9
  Top Layer w0.635: C66.2@39.536,80.231 56.808,80.231 62.9,74.139
URFSW_J1: C36.2 U7.12 | length 1.1
  Top Layer w0.2: C36.2@33.95,64.689 34.823,64.689 34.874,64.739 U7.12@35.011,64.739
  Top Layer w0.25: U7.12@34.986,64.714 U7.12@35.011,64.739
URFSW_J2: C37.2 U7.9 | length 1.1
  Top Layer w0.2: C37.2@33.95,66.734 33.994,66.689 U7.9@35.013,66.689
USB_D+: R07.1 U1.33 | length 6.9
  Top Layer w0.22: R07.1@9.25,49.689 11,49.689 11.4,50.089 12.827,50.089 12.857,50.059 13.827,50.059 13.857,50.089 U1.33@15.961,50.089
USB_D+_CON: JUSB.3 R05.2 R07.2 U2.6 | length 5.7
  Top Layer w0.22: JUSB.3@4.8,52.339 4.89,52.249 5.586,52.249 5.715,52.12 5.715,52.092 6.528,51.279 6.775,51.279 U2.6@6.915,51.139 6.915,50.324 7.11,50.129 7.11,50.079 7.55,49.639 R05.2@7.55,48.289
USB_D-: R06.1 U1.32 | length 9
  Top Layer w0.22: R06.1@9.25,54.364 10.075,54.364 12.1,52.339 12.1,51.339 13.01,50.429 13.673,50.429 13.833,50.589 U1.32@15.961,50.589
USB_D-_CON: JUSB.2 R06.2 U2.4 | length 3.8
  Top Layer w0.22: JUSB.2@4.8,52.989 4.825,53.014 6.89,53.014 U2.4@6.915,53.039 7.015,53.039 7.155,53.179 7.155,53.279 7.539,53.663 7.539,54.353 R06.2@7.55,54.364
USB_EN: R05.1 U1.31 | length 8.3
  Top Layer w0.22: R05.1@9.25,48.289 10.8,48.289 v1(10.9,48.389) ; v1(13.4,51.089) 14.056,51.089 U1.31@15.961,51.089
  Bottom Layer w0.22: v1(10.9,48.389) 10.9,49.064 12.975,51.139 13.025,51.089 v1(13.4,51.089)
X1_OUT: C30.1 X2.3 | length 1.8
  Top Layer w0.25: X2.3@42.32,44.93 42.436,45.046 C30.1@42.436,46.639
pads on no net: C07.0 C08.0 U1.2 U1.3 U1.4 U1.10 U1.19 U1.30 U2.1 U2.3 U2.7 U4.14 U4.15 U4.25 U11.3 U11.6 U12.7

## Polygon pours and split planes (outlines as drawn)
GND on Bottom Layer "GND_L04_P001" (solid, pour order 1): 0,97 69.9,97 69.9,3 0,3
GND on InternalGND "GND_L02_P002" (solid, pour order 2): 0,97 69.9,97 69.9,3 0,3
GND on Top Layer "GND_L01_P000" (solid, pour order 0): 0,97 69.9,97 69.9,3 0,3
3V3 on Internal3V3 "3V3_L03_P003" (solid, pour order 3): 0,97 69.9,97 69.9,3 0,3

## Other copper
Top Layer:
  rectangle net 3V3: 41,38.789 48.4,42.639
  rectangle net 3V3: 40.05,42.039 42.8,43.789
  rectangle net 3V3: 40.05,39.739 44.386,42.639
  rectangle net 5V: 50.727,65.089 58.65,66.689
  rectangle net 5V: 22.5,69.389 25.95,74.527
  rectangle net GND: 50.3,59.639 50.748,60.639
  rectangle net GND: 29.123,55.032 29.8,56.089
  rectangle net 3V3RF_L01CPU: 60.106,41.789 63.9,44.227
  pour cut-out: 22.989,75.072 23.82,74.169 23.9,74.089 25.015,74.089 25.918,74.539 24.903,74.539 24.806,76.889 22.421,76.889 22.421,75.639
  pour cut-out: 25.918,74.539 28.403,74.539 28.403,72.224 28.433,72.224 25.918,72.224 25.918,73.97
  pour cut-out: 28.09,56.855 28.717,56.855 28.717,56.042 29.15,55.609 29.146,55.605 29.146,54.085 28.296,54.085 28.25,54.039 28.1,54.189 28.1,56.854
  pour cut-out: 6.85,55.214 9.95,55.214 9.95,53.914 6.927,53.914 6.85,53.991
  pour cut-out: 6.65,50.324 9.935,50.324 9.95,50.339 9.95,47.639 6.65,47.639
  pour cut-out: 5.5,53.014 5.5,51.326 5.513,51.339 7.49,51.339 7.49,53.044 7.46,53.014
Internal3V3:
  pour cut-out: 54.809,74.8 54.809,71.381 50.631,71.381 50.612,71.4 50.612,74.8
  pour cut-out: 21.7,68.7 21.7,65.281 17.522,65.281 17.503,65.3 17.503,68.7
  pour cut-out: 17.1,81.9 22.2,81.9 22.2,76.1 17.1,76.1
  pour cut-out: 10.559,29.2 60,29.2 60,21 10.559,21

## Silkscreen, mask and mechanical layers (free items; w line width, h text height)
Top Overlay:
  text "Electrosense Wideband Converter v2.0" at 13.65,96.839 h3
  text "Franco Minucci" at 10,94.907 h2.5
  text "Bertold Van den Bergh" at 26.55,94.907 h2.5
  text "Sofie Pollin" at 51.1,94.789 h2.5
  text "C33" at 23.046,69.779 h0.8 r90
  text "C34" at 24.496,69.779 h0.8 r90
  text "C42" at 40.446,69.38 h0.8 r90
  text "C44" at 60.654,69.38 h0.8
  text "C46" at 56.229,66.738 h0.8 r90
  text "R13" at 46.446,65.054 h0.8 r90
  text "C15" at 50.046,63.954 h0.8 r90
  text "C45" at 58.546,63.954 h0.8 r90
  text "C26" at 40.584,62.785 h0.8
  text "R12" at 42.096,61.435 h0.8
  text "L2" at 23.405,61.043 h0.8 r90
  text "C06" at 31.454,55.873 h0.8
  text "C05" at 31.454,54.493 h0.8
  text "R16" at 52.29,53.054 h0.8
Top Paste:
  rectangle: 17.35,65.189 21.425,68.839
  rectangle: 50.486,71.178 54.561,74.828
Top Solder:
  rectangle: 17.35,65.189 21.425,68.839
  rectangle: 50.486,71.178 54.561,74.828
Outline:
  lines w0.05: 0,2.595 0.001,97.294 cw(c2.596,97.294) 2.596,99.889 67.305,99.889 cw(c67.305,97.294) 69.9,97.294 69.9,2.615 cw(c67.305,2.615) 67.305,0.02 2.596,0.04 cw(c2.596,2.635) 0.001,2.635

## Text inside footprints (layer, text, board x,y; h text height)
JUSB: Mechanical 13 "PCB Edge" at -2.18,47.32 h0.2